# EAGLE board Tugas Akhir (EAGLE 7.5.0)
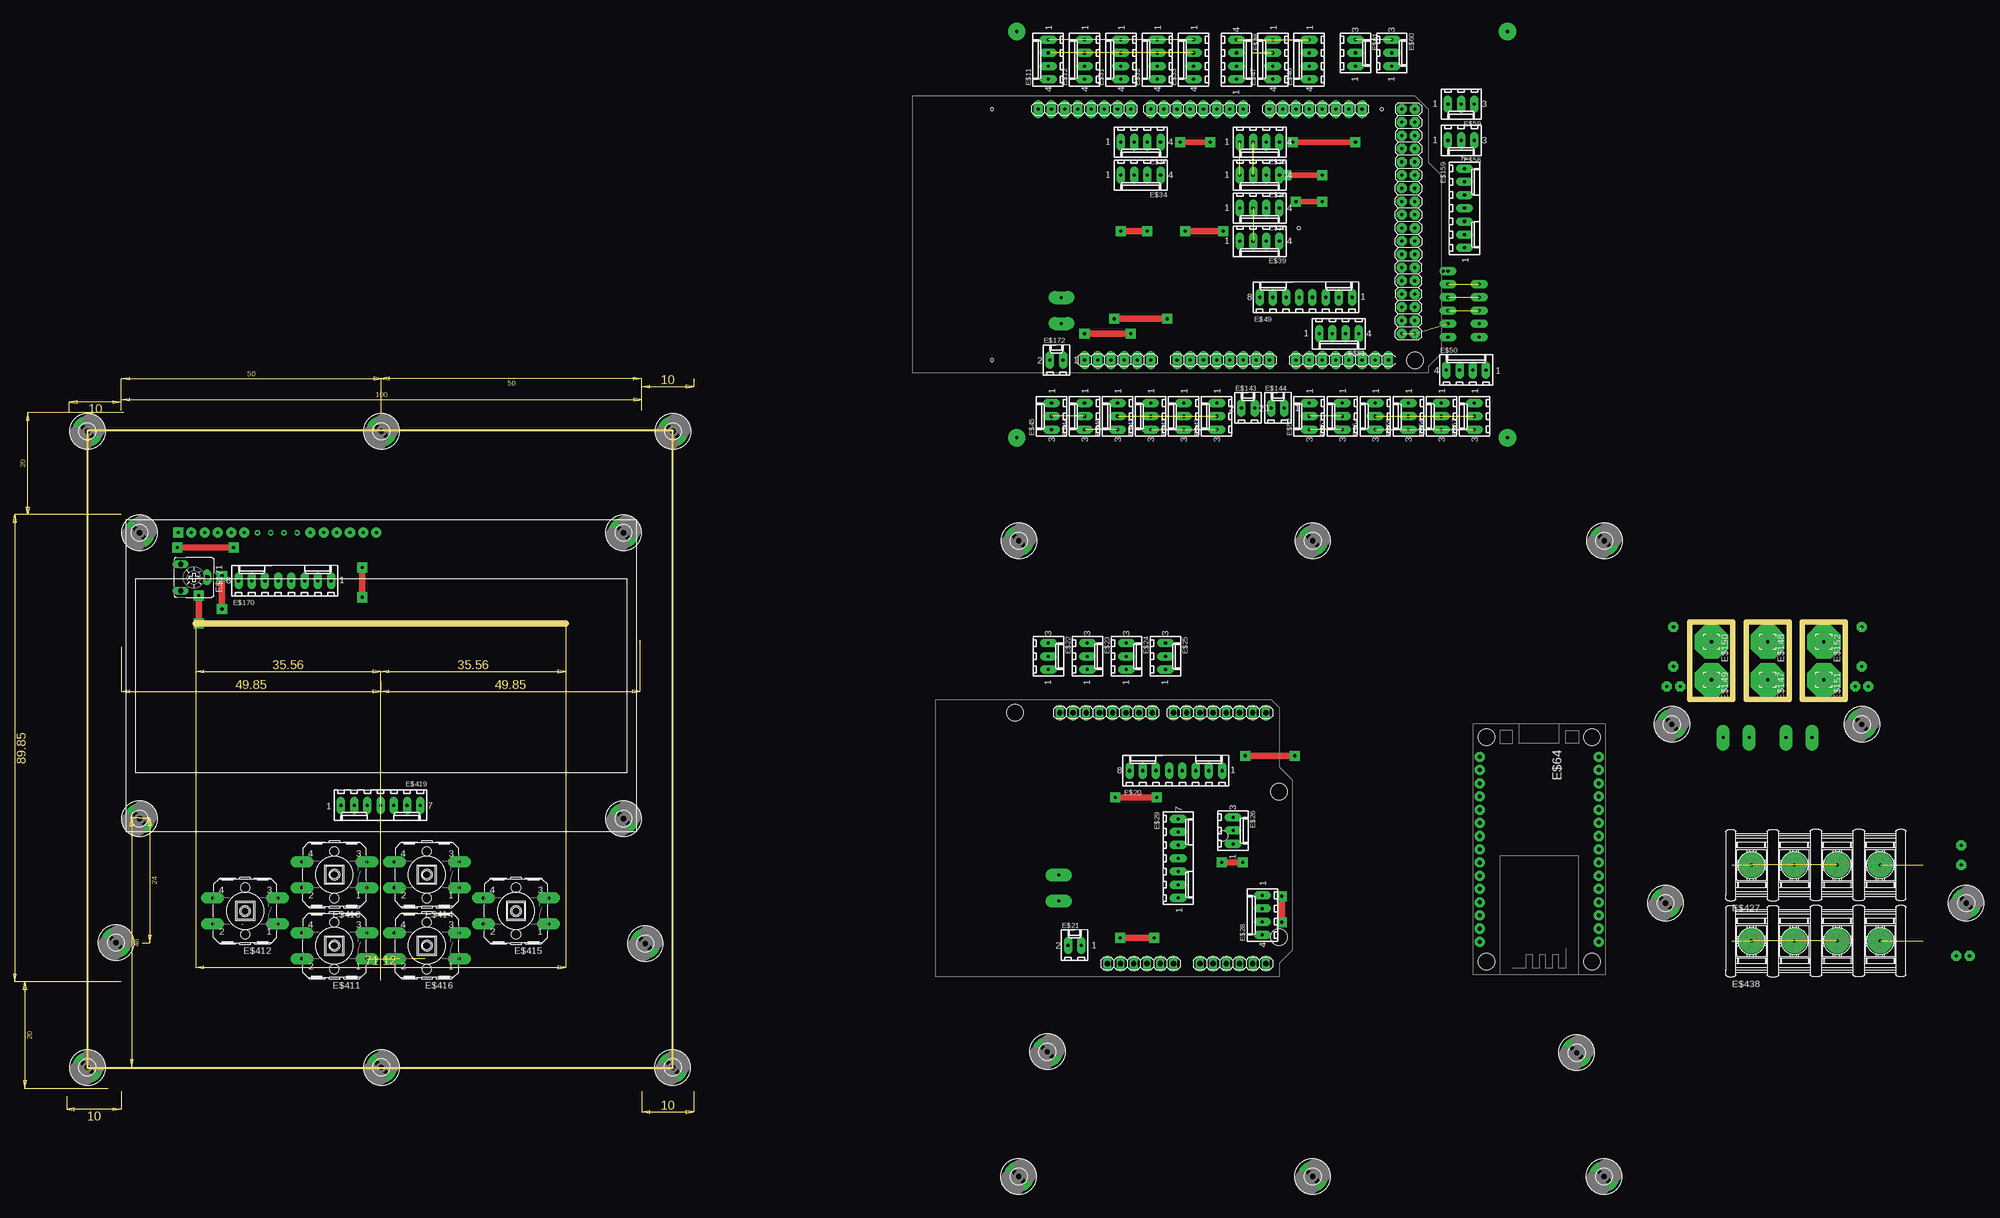
[diagram p0: board, top side]
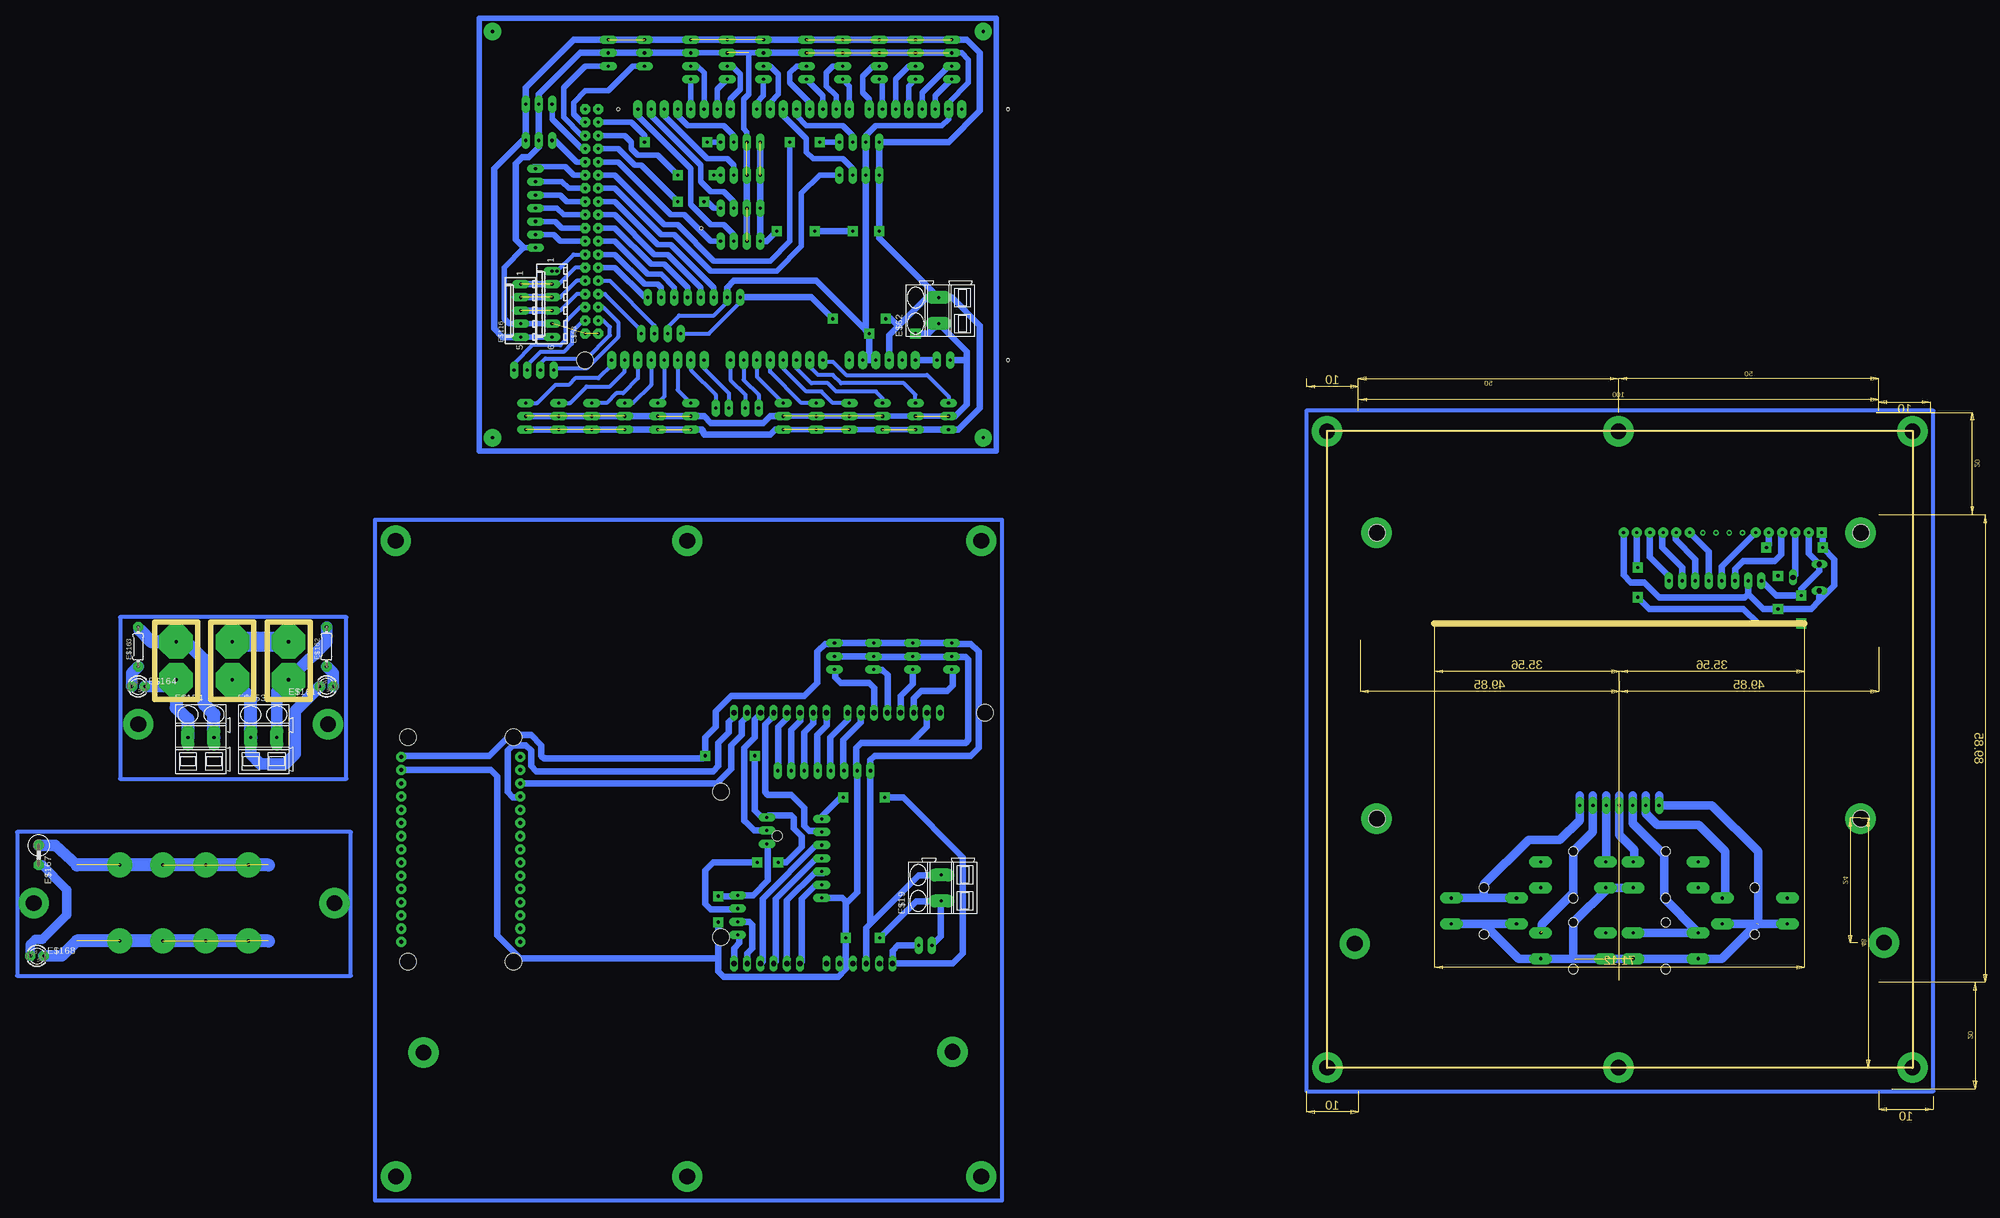
[diagram p1: board, bottom side, seen from below]

Size 352.13 x 141.6 mm. Coordinates in mm from the lower left corner, seen from the top.
Outline: 35.08,94.19 106.2,94.19
Outline: 126.8,131.3 14.3,131.3 14.3,8.8 126.8,8.8 126.8,131.3
Outline: 322.28,94.52 330.54,94.52 330.54,79.59 322.28,79.59 322.28,94.52
Outline: 333.08,94.52 341.33,94.52 341.33,79.59 333.08,79.59 333.08,94.52
Outline: 343.87,94.52 352.13,94.52 352.13,79.59 343.87,79.59 343.87,94.52
Copper layers (1*16): Top 0.035mm / dielectric 1.5mm / Bottom 0.035mm
Design rules "default": minimum track width 10mil, minimum drill 24mil, track to track 8mil, track to pad 8mil, pad to pad 8mil, via to via 8mil, smd to smd 8mil, copper to edge 40mil, drill to drill 8mil, minimum pad ring 10mil, minimum via ring 8mil, stop-mask expansion 4mil, vias tented up to drill 0mil, thermal gap 10mil

## Footprints (pad centres in the part's own frame; a part is rotated, then mirrored left to right if it is on the bottom)
3,0-PAD = drill 3 pad 5.842: B3,0 0,0
ARDUINO2009 = drill 1.016 long: 1 33.02,2.54; 2 35.56,2.54; 3 38.1,2.54; 4 40.64,2.54; 5 43.18,2.54; 6 45.72,2.54; 7 50.8,2.54; 8 53.34,2.54; 9 55.88,2.54; 10 58.42,2.54; 11 60.96,2.54; 12 63.5,2.54; 13 63.5,50.8; 14 60.96,50.8; 15 58.42,50.8; 16 55.88,50.8; 17 53.34,50.8; 18 50.8,50.8; 19 48.26,50.8; 20 45.72,50.8; 21 41.656,50.8; 22 39.116,50.8; 23 36.576,50.8; 24 34.036,50.8; 25 31.496,50.8; 26 28.956,50.8; 27 26.416,50.8; 28 23.876,50.8 | hole 3.2: 15.24,50.8; 66.04,35.56; 66.04,7.62 | hole 2: 55.17,27.114
MEGA_ARDUINO = drill 0.6 pad 1.778 long: 1 -27.94,-19.05; 2 -25.4,-19.05; 3 -22.86,-19.05; 4 -20.32,-19.05; 5 -17.78,-19.05; 6 -15.24,-19.05; 7 -10.16,-19.05; 8 -7.62,-19.05; 9 -5.08,-19.05; 10 -2.54,-19.05; 11 0,-19.05; 12 2.54,-19.05; 13 5.08,-19.05; 14 7.62,-19.05; 15 12.7,-19.05; 16 15.24,-19.05; 17 17.78,-19.05; 18 20.32,-19.05; 19 22.86,-19.05; 20 25.4,-19.05; 21 27.94,-19.05; 22 30.48,-19.05; 23 25.4,29.21; 24 22.86,29.21; 25 20.32,29.21; 26 17.78,29.21; 27 15.24,29.21; 28 12.7,29.21; 29 10.16,29.21; 30 7.62,29.21; 31 2.54,29.21; 32 0,29.21; 33 -2.54,29.21; 34 -5.08,29.21; 35 -7.62,29.21; 36 -10.16,29.21; 37 -12.7,29.21; 38 -15.24,29.21; 39 -19.05,29.21; 40 -21.59,29.21; 41 -24.13,29.21; 42 -26.67,29.21; 43 -29.21,29.21; 44 -31.75,29.21; 45 -34.29,29.21; 46 -36.83,29.21 | drill 0.6 pad 1.93 octagon: 47 33.02,29.21; 48 35.56,29.21; 49 33.02,26.67; 50 35.56,26.67; 51 33.02,24.13; 52 35.56,24.13; 53 33.02,21.59; 54 35.56,21.59; 55 33.02,19.05; 56 35.56,19.05; 57 33.02,16.51; 58 35.56,16.51; 59 33.02,13.97; 60 35.56,13.97; 61 33.02,11.43; 62 35.56,11.43; 63 33.02,8.89; 64 35.56,8.89; 65 33.02,6.35; 66 35.56,6.35; 67 33.02,3.81; 68 35.56,3.81; 69 33.02,1.27; 70 35.56,1.27; 71 33.02,-1.27; 72 35.56,-1.27; 73 33.02,-3.81; 74 35.56,-3.81; 75 33.02,-6.35; 76 35.56,-6.35; 77 33.02,-8.89; 78 35.56,-8.89; 79 33.02,-11.43; 80 35.56,-11.43; 81 33.02,-13.97; 82 35.56,-13.97 | hole 0.6: -45.72,29.21; -45.72,-19.05; 29.21,29.21; 13.208,6.35 | hole 3.2: 35.56,-19.05
6410-04 = drill 0.6 pad 1.676 long: 1 3.81,0; 2 1.27,0; 3 -1.27,0; 4 -3.81,0
SMKDSP_1,5/2 = drill 0.6 pad 2.54 long: 1 -2.5,0; 2 2.5,0
6410-08 = drill 0.6 pad 1.676 long: 1 8.89,0; 2 6.35,0; 3 3.81,0; 4 1.27,0; 5 -1.27,0; 6 -3.81,0; 7 -6.35,0; 8 -8.89,0
6410-02 = drill 0.6 pad 1.676 long: 1 1.27,0; 2 -1.27,0
6410-03 = drill 0.6 pad 1.676 long: 1 2.54,0; 2 0,0; 3 -2.54,0
6410-07 = drill 0.6 pad 1.676 long: 1 7.62,0; 2 5.08,0; 3 2.54,0; 4 0,0; 5 -2.54,0; 6 -5.08,0; 7 -7.62,0
6410-06 = drill 0.6 pad 1.676 long: 1 6.35,0; 2 3.81,0; 3 1.27,0; 4 -1.27,0; 5 -3.81,0; 6 -6.35,0
ESP12E_DEVKIT = drill 0.8 pad 1.93: 3V3@0 -11.43,-7.62; 3V3@1 11.43,5.08; 3V3@2 11.43,-17.78; AD0 -11.43,17.78; CLK -11.43,-2.54; CMD -11.43,2.54; D0 11.43,17.78; D1 11.43,15.24; D2 11.43,12.7; D3 11.43,10.16; D4 11.43,7.62; D5 11.43,0; D6 11.43,-2.54; D7 11.43,-5.08; D8 11.43,-7.62; EN -11.43,-10.16; GND@0 -11.43,-5.08; GND@1 -11.43,-15.24; GND@2 11.43,2.54; GND@3 11.43,-15.24; RST -11.43,-12.7; RSV@0 -11.43,15.24; RSV@1 -11.43,12.7; RX 11.43,-10.16; SD0 -11.43,0; SD1 -11.43,5.08; SD2 -11.43,7.62; SD3 -11.43,10.16; TX 11.43,-12.7; VIN -11.43,-17.78 | hole 3.2: -10.16,21.59; 10.16,21.59; 10.16,-21.59; -10.16,-21.59
6410-05 = drill 0.6 pad 1.676 long: 1 5.08,0; 2 2.54,0; 3 0,0; 4 -2.54,0; 5 -5.08,0
3,17/1,3 = drill 0.6 pad 6.452 octagon: 1 0,0
LED3MM = drill 0.6 pad 1.93 octagon: A -1.27,0; K 1.27,0
0204/7 = drill 0.6 pad 1.93 octagon: 1 -3.81,0; 2 3.81,0
0411V = drill 0.6 pad 1.93 octagon: 1 -2.54,0; 2 1.27,0
LCD-20X4-4HOLES = drill 0.6 pad 1.93 square: P$1 10,57.5 | drill 0.6 pad 1.93: P$2 12.54,57.5; P$3 15.08,57.5; P$4 17.62,57.5; P$5 20.16,57.5; P$6 22.7,57.5; P$11 35.4,57.5; P$12 37.94,57.5; P$13 40.48,57.5; P$14 43.02,57.5; P$15 45.56,57.5; P$16 48.1,57.5 | drill 0.5 pad 0.254: P$7 25.24,57.5; P$8 27.78,57.5; P$9 30.32,57.5; P$10 32.86,57.5 | hole 3.2: 2.5,2.5; 2.5,57.5; 95.5,57.5; 95.5,2.5
CA6V = drill 1.016 long: A -2.54,-2.54; E 2.54,-2.54; S 0,2.54
B3F-40XX = drill 0.6 pad 2.184 long: 1 -6.248,2.489; 2 6.248,2.489; 3 -6.248,-2.489; 4 6.248,-2.489 | hole 1.803: 0,-4.496; 0,4.496
5202-04-N-02 = drill 0.6 pad 4.826: 1 -12.375,0; 2 -4.125,0; 3 4.125,0; 4 12.375,0

## Placement (x,y rotation side)
E$1  [3,0-PAD]  14.28,8.88 0 top
E$2  [3,0-PAD]  126.78,8.88 0 top
E$3  [3,0-PAD]  14.29,131.15 0 top
E$4  [3,0-PAD]  126.81,131.15 0 top
E$5  [3,0-PAD]  70.79,131.15 0 top
E$6  [3,0-PAD]  70.78,8.88 0 top
E$7  [3,0-PAD]  198.78,11.88 0 top
E$8  [3,0-PAD]  300.5,11.7 0 top
E$9  [ARDUINO2009]  177.3,26.3 0 top
E$10  [MEGA_ARDUINO]  233.86,163.91 0 top  (outside the outline)
E$11  [6410-04]  198.94,202.65 90 top  (outside the outline)
E$12  [6410-04]  205.92,202.65 90 top  (outside the outline)
E$13  [3,0-PAD]  193.28,-12.12 0 top  (outside the outline)
E$14  [3,0-PAD]  305.78,-12.12 0 top  (outside the outline)
E$15  [3,0-PAD]  193.29,110.15 0 top
E$16  [3,0-PAD]  305.81,110.15 0 top
E$17  [3,0-PAD]  249.79,110.15 0 top
E$18  [3,0-PAD]  249.78,-12.12 0 top  (outside the outline)
E$19  [SMKDSP_1,5/2]  200.98,43.38 90 bottom
E$20  [6410-08]  223.47,65.92 0 top
E$21  [6410-02]  204.02,32.36 0 top
E$22  [6410-03]  198.98,87.91 270 top
E$23  [6410-03]  206.48,87.91 270 top
E$24  [6410-03]  213.98,87.91 270 top
E$25  [6410-03]  221.48,87.91 270 top
E$26  [6410-03]  234.48,54.41 270 top
E$28  [6410-04]  240.1,38.14 90 top
E$29  [6410-07]  223.95,49.07 270 top
E$31  [6410-04]  212.91,202.65 90 top  (outside the outline)
E$32  [6410-04]  219.89,202.65 90 top  (outside the outline)
E$33  [6410-04]  226.88,202.65 90 top  (outside the outline)
E$34  [6410-04]  216.72,180.42 180 top  (outside the outline)
E$35  [6410-04]  239.58,186.77 180 top  (outside the outline)
E$36  [6410-04]  239.58,180.42 180 top  (outside the outline)
E$37  [6410-04]  216.72,186.77 180 top  (outside the outline)
E$38  [6410-04]  239.58,174.07 180 top  (outside the outline)
E$39  [6410-04]  239.58,167.72 180 top  (outside the outline)
E$40  [6410-03]  212.27,134.06 90 top
E$41  [6410-03]  218.62,134.06 90 top
E$42  [6410-03]  224.97,134.06 90 top
E$43  [6410-03]  231.32,134.06 90 top
E$44  [6410-03]  205.92,134.06 90 top
E$45  [6410-03]  199.57,134.06 90 top
E$46  [6410-04]  249.1,202.65 90 top  (outside the outline)
E$47  [6410-04]  242.12,202.65 90 top  (outside the outline)
E$48  [6410-04]  235.13,202.65 270 top  (outside the outline)
E$49  [6410-08]  248.47,156.93 0 top  (outside the outline)
E$50  [6410-04]  279.26,142.96 0 top
E$51  [6410-04]  254.82,149.94 180 top  (outside the outline)
E$52  [6410-03]  249.1,134.06 90 top
E$53  [6410-03]  255.45,134.06 90 top
E$54  [6410-03]  261.8,134.06 90 top
E$55  [6410-03]  268.15,134.06 90 top
E$56  [6410-03]  274.5,134.06 90 top
E$57  [6410-03]  280.85,134.06 90 top
E$58  [6410-03]  278.31,187.09 180 top  (outside the outline)
E$59  [6410-03]  278.31,194.07 180 top  (outside the outline)
E$60  [6410-03]  264.98,203.92 270 top  (outside the outline)
E$61  [6410-03]  257.99,203.92 270 top  (outside the outline)
E$62  [SMKDSP_1,5/2]  201.48,154.39 90 bottom  (outside the outline)
E$63  [6410-06]  275.77,155.66 90 bottom  (outside the outline)
E$64  [ESP12E_DEVKIT]  293.3,50.8 180 top
E$116  [6410-05]  281.81,154.39 90 bottom  (outside the outline)
E$143  [6410-02]  237.36,135.65 0 top
E$144  [6410-02]  243.07,135.65 0 top
E$147  [3,17/1,3]  337.2,83.41 270 top
E$148  [3,17/1,3]  337.2,90.71 270 top
E$149  [3,17/1,3]  326.41,83.41 270 top
E$150  [3,17/1,3]  326.41,90.71 270 top
E$151  [3,17/1,3]  348,83.41 270 top
E$152  [3,17/1,3]  348,90.71 270 top
E$153  [SMKDSP_1,5/2]  331.17,72.29 0 bottom
E$154  [SMKDSP_1,5/2]  343.24,72.29 0 bottom
E$159  [6410-07]  278.95,174.07 270 top  (outside the outline)
E$161  [LED3MM]  319.11,82.13 180 bottom
E$162  [0204/7]  319.11,89.75 90 bottom
E$163  [0204/7]  355.3,89.75 90 bottom  (outside the outline)
E$164  [LED3MM]  355.3,82.13 0 bottom
E$167  [0411V]  374.42,49.05 270 bottom  (outside the outline)
E$168  [LED3MM]  374.74,30.32 0 bottom  (outside the outline)
E$169  [LCD-20X4-4HOLES]  21.75,54.18 0 top
E$170  [6410-08]  52.23,102.44 0 top
E$171  [CA6V]  34.77,103.08 270 top
E$172  [6410-02]  200.52,144.86 0 top  (outside the outline)
E$184  [3,0-PAD]  317.59,40.47 0 top
E$185  [3,0-PAD]  375.38,40.47 0 top  (outside the outline)
E$186  [3,0-PAD]  318.79,74.83 0 top
E$187  [3,0-PAD]  355.3,74.83 0 top  (outside the outline)
E$411  [B3F-40XX]  61.75,32.28 180 top
E$412  [B3F-40XX]  44.61,38.95 180 top
E$413  [B3F-40XX]  61.75,45.93 180 top
E$414  [B3F-40XX]  79.53,45.93 180 top
E$415  [B3F-40XX]  96.68,38.95 180 top
E$416  [B3F-40XX]  79.53,32.28 180 top
E$417  [3,0-PAD]  19.78,32.88 0 top
E$418  [3,0-PAD]  121.5,32.7 0 top
E$419  [6410-07]  70.64,59.27 180 top
E$420  [3,0-PAD]  24.29,56.72 0 top
E$421  [3,0-PAD]  117.31,56.72 0 top
E$422  [3,0-PAD]  24.29,111.65 0 top
E$423  [3,0-PAD]  117.31,111.65 0 top
E$427  [5202-04-N-02]  346.48,47.78 0 top
E$438  [5202-04-N-02]  346.48,33.17 0 top

## Library data of the parts
E$1-E$8 E$13-E$18 E$184-E$187 E$417 E$418 E$420-E$423 = holes
E$9 E$10 = arduino
E$11 E$12 E$20-E$26 E$28 E$29 E$31-E$61 E$63 E$116 E$143 E$144 E$159 E$170 E$172 E$419 = con-molex
E$19 E$62 E$153 E$154 = con-phoenix-smkdsp
E$64 = ESP12E_DEVKIT
E$147-E$152 = wirepad
E$161 E$164 E$168 = led
E$162 E$163 E$167 = resistor
E$169 = HD44780LCD
E$171 = pot
E$411-E$416 = switch-omron
E$427 E$438 = con-ebyelectro

## Nets
S$3: E$10.34 E$37.3
S$4: E$10.33 E$34.3
S$5: E$10.52 E$60.1
S$6: E$10.50 E$61.1
S$7: E$10.73 E$51.3
S$8: E$10.54 E$59.1
S$9: E$10.56 E$58.1
S$10: E$10.44 E$11.4
S$11: E$10.43 E$11.3
S$12: E$10.26 E$35.3
S$13: E$10.25 E$36.3
S$14: E$10.24 E$38.3
S$15: E$10.23 E$39.3
S$16: E$10.42 E$12.4
S$17: E$10.41 E$12.3
S$18: E$10.40 E$31.4
S$19: E$10.39 E$31.3
S$20: E$10.58 E$159.7
S$21: E$10.38 E$32.4
S$22: E$10.37 E$32.3
S$23: E$10.36 E$33.4
S$24: E$10.35 E$33.3
S$25: E$10.31 E$48.1
S$27: E$10.32 E$48.2
S$28: E$10.49 E$35.4
S$29: E$10.51 E$36.4
S$30: E$10.53 E$38.4
S$31: E$10.55 E$39.4
S$32: E$10.57 E$37.4
S$33: E$10.59 E$34.4
S$34: E$10.61 E$49.6
S$35: E$10.75 E$51.4
S$36: E$10.76
S$37: E$10.72
S$38: E$10.74
S$39: E$10.70 E$63.1
S$40: E$10.63 E$49.5
S$41: E$10.13 E$143.2
S$42: E$10.11 E$42.1
S$43: E$10.10 E$41.1
S$44: E$10.9 E$40.1
S$45: E$10.8 E$44.1
S$46: E$10.7 E$45.1
S$47: E$10.14 E$143.1
S$48: E$10.65 E$49.4
S$49: E$10.67 E$49.3
S$50: E$10.12 E$43.1
S$51: E$10.15 E$144.2
S$52: E$10.16 E$144.1
S$53: E$10.71 E$49.1
S$54: E$10.69 E$49.2
S$55: E$10.17 E$52.1
S$57: E$10.60 E$159.6
S$58: E$10.30 E$47.3
S$59: E$10.29 E$47.4
S$60: E$10.28 E$46.3
S$61: E$10.27 E$46.4
S$62: E$10.18 E$53.1
S$63: E$10.19 E$54.1
S$64: E$10.20 E$55.1
S$65: E$10.21 E$56.1
S$66: E$10.22 E$57.1
S$67: E$10.68 E$159.2
S$68: E$10.79 E$50.3
S$69: E$10.77 E$50.4
S$70: E$10.80 E$50.2
S$71: E$10.78 E$50.1
S$72: E$10.66 E$159.3
S$73: E$10.64 E$159.4
S$74: E$10.62 E$159.5
S$75: E$9.16 E$29.6
S$76: E$9.4 E$9.5 E$9.27 E$19.1 E$20.7 E$21.2 E$22.2 E$23.2 E$24.2 E$25.2 E$26.1 E$28.1 E$29.1 E$64.GND@1
S$77: E$9.1 E$21.1 E$29.7
S$79: E$9.13 E$64.RX
S$80: E$9.26 E$22.1
S$81: E$9.25 E$23.1
S$82: E$9.24 E$24.1
S$83: E$9.23 E$25.1
S$84: E$10.3 E$11.1 E$12.1 E$31.1 E$32.1 E$33.1 E$34.1 E$35.1 E$36.1 E$37.1 E$38.1 E$39.1 E$40.3 E$41.3 E$42.3 E$43.3 E$44.3 E$45.3 E$46.1 E$47.1 E$48.4 E$49.8 E$51.1 E$52.3 E$53.3 E$54.3 E$55.3 E$56.3 E$57.3 E$58.3 E$59.3 E$60.3 E$61.3 E$62.2 E$63.6 E$116.5
S$85: E$10.4 E$10.5 E$10.45 E$10.81 E$10.82 E$11.2 E$12.2 E$31.2 E$32.2 E$33.2 E$34.2 E$35.2 E$36.2 E$37.2 E$38.2 E$39.2 E$40.2 E$41.2 E$42.2 E$43.2 E$44.2 E$45.2 E$46.2 E$47.2 E$48.3 E$49.7 E$51.2 E$52.2 E$53.2 E$54.2 E$55.2 E$56.2 E$57.2 E$58.2 E$59.2 E$60.2 E$61.2 E$62.1 E$63.5 E$116.4 E$159.1 E$172.2
S$86: E$63.4 E$116.3
S$87: E$63.3 E$116.2
S$88: E$63.2 E$116.1
S$90: E$9.14 E$64.TX
S$95: E$9.17 E$20.1
S$96: E$9.18 E$20.2
S$97: E$9.19 E$20.3
S$98: E$9.20 E$20.4
S$99: E$9.12 E$28.4
S$100: E$9.11 E$28.3
S$101: E$9.7 E$29.2
S$102: E$9.8 E$29.3
S$103: E$9.9 E$29.4
S$104: E$9.10 E$29.5
S$105: E$9.21 E$20.5
S$106: E$9.22 E$20.6
S$107: E$9.15 E$26.2
S$110: E$9.3 E$19.2 E$20.8 E$22.3 E$23.3 E$24.3 E$25.3 E$26.3 E$28.2 E$64.VIN
S$114: E$149.1 E$153.2 E$162.2
S$115: E$148.1 E$150.1
S$199: E$147.1 E$153.1 E$161.K
S$200: E$152.1 E$154.2 E$163.2
S$201: E$151.1 E$154.1 E$164.K
S$204: E$161.A E$162.1
S$205: E$163.1 E$164.A
S$212: E$167.2 E$168.A
S$213: E$169.P$2 E$169.P$15 E$170.8 E$171.A
S$214: E$169.P$1 E$169.P$5 E$169.P$16 E$170.7 E$171.E
S$215: E$169.P$4 E$170.6
S$216: E$169.P$6 E$170.5
S$217: E$169.P$14 E$170.1
S$218: E$169.P$13 E$170.2
S$219: E$169.P$12 E$170.3
S$220: E$169.P$11 E$170.4
S$221: E$169.P$3 E$171.S
S$225: E$10.1 E$172.1
S$401: E$411.3 E$411.4 E$419.3
S$402: E$411.1 E$411.2 E$412.1 E$412.2 E$413.1 E$414.2 E$415.1 E$415.2 E$416.1 E$416.2 E$419.1
S$403: E$412.3 E$419.2
S$404: E$413.3 E$419.4
S$405: E$414.4 E$419.5
S$406: E$416.3 E$419.6
S$407: E$415.3 E$415.4 E$419.7
S$424: E$167.1 E$427.1 E$427.2 E$427.3 E$427.4
S$425: E$168.K E$438.1 E$438.2 E$438.3 E$438.4

## Tracks (layer width: path | path; a pad name or v marks a point on that pad's centre or on a via)
S$1
  Bottom 0.813: 189.3,114.14 309.81,114.14 309.81,-16.71 189.3,-16.71 189.3,114.14
S$2  (via drill 0.6 pad 1.93)
  other vias: 212.8,33.8
S$3
  Bottom 1.016: E$10.34 228.78,191.85 226.88,189.95 219.89,189.95 217.99,188.04 E$37.3
S$4
  Bottom 1.016: E$10.33 231.32,191.85 226.88,187.41 226.88,184.87 225.61,183.59 219.89,183.59 217.99,181.69 E$34.3
S$5
  Bottom 1.016: E$10.52 270.06,188.04 273.55,191.53 273.55,197.25 269.42,201.38 E$60.1
S$6
  Bottom 1.016: E$61.1 260.21,201.38 264.98,196.61 269.42,196.61 271.64,194.39 271.64,192.17 270.06,190.58 E$10.50
S$7
  Bottom 0.813: E$10.73 264.66,160.1 256.09,151.53 E$51.3
S$8
  Bottom 1.016: E$10.54 270.06,185.5 275.77,191.22 E$59.1
S$9
  Bottom 1.016: E$10.56 271.01,182.96 275.14,187.09 E$58.1
S$10
  Bottom 1.016: E$10.44 202.11,195.66 E$11.4
S$11
  Bottom 1.016: E$10.43 204.65,196.3 199.57,201.38 E$11.3
S$12
  Bottom 1.016: E$10.26 251.64,191.85 249.74,189.95 242.75,189.95 240.85,188.04 E$35.3
S$13
  Bottom 1.016: E$10.25 254.18,191.85 245.93,183.59 242.12,183.59 240.85,182.33 E$36.3
S$14
  Bottom 1.016: E$10.24 256.72,191.85 247.2,182.33 247.2,179.15 245.29,177.25 242.75,177.25 240.85,175.34 E$38.3
S$15
  Bottom 1.016: E$10.23 259.26,191.85 249.1,181.69 249.1,174.71 245.29,170.9 242.75,170.9 240.85,168.99 E$39.3
S$16
  Bottom 1.016: E$10.42 207.19,197.56 E$12.4
S$17
  Bottom 1.016: E$10.41 209.73,198.84 207.19,201.38 E$12.3
S$18
  Bottom 1.016: E$10.40 212.27,198.2 E$31.4
S$19
  Bottom 1.016: E$10.39 214.81,195.03 216.08,196.3 216.08,199.47 214.18,201.38 E$31.3
S$20
  Bottom 1.016: E$159.7 279.26,182.01 273.23,182.01 271.64,180.42 E$10.58
S$21
  Bottom 1.016: E$10.38 218.62,197.56 E$32.4
S$22
  Bottom 1.016: E$32.3 221.8,201.38 223.07,200.11 223.07,197.56 221.16,195.66 E$10.37
S$23
  Bottom 1.016: E$10.36 223.7,195.66 E$33.4
S$24
  Bottom 1.016: E$10.35 226.24,194.39 230.05,198.2 230.05,200.11 228.78,201.38 E$33.3
S$25
  Bottom 1.016: E$48.1 235.13,195.66 236.4,194.39 E$10.31
S$26
  Bottom 1.016: 190.37,210.58 289.74,210.58 289.74,127.4 190.37,127.4 190.37,210.58
S$27
  Bottom 1.016: E$48.2 233.86,201.38 232.27,199.79 232.27,195.98 233.86,194.39 E$10.32
S$28  (via drill 0.6 pad 1.93)
  Top 1.016: v245.93,186.77 v257.99,186.77
  Bottom 1.016: E$35.4 v245.93,186.77 | E$10.49 260.53,190.58 257.99,188.04 v257.99,186.77
S$29  (via drill 0.6 pad 1.93)
  Top 1.016: v244.66,180.42 v251.64,180.42
  Bottom 1.016: E$36.4 v244.66,180.42 | E$10.51 261.8,188.04 260.53,186.77 260.53,185.5 259.26,184.23 255.45,184.23 v251.64,180.42
S$30  (via drill 0.6 pad 1.93)
  Top 1.016: v251.64,175.34 v246.56,175.34
  Bottom 1.016: E$10.53 263.07,185.5 259.9,182.33 258.63,182.33 v251.64,175.34 | v246.56,175.34 245.93,175.34 244.66,174.07 E$38.4
S$31
  Bottom 1.016: E$10.55 263.07,182.96 252.91,172.8 250.37,172.8 245.29,167.72 E$39.4
S$32  (via drill 0.6 pad 1.93)
  Top 1.016: v224.34,186.77 v230.05,186.77
  Bottom 1.016: E$37.4 v224.34,186.77 | v230.05,186.77 230.05,167.72 233.86,163.91 244.66,163.91 251.64,170.9 254.18,170.9 263.71,180.42 E$10.57
S$33
  Bottom 1.016: E$10.59 263.71,177.88 254.82,168.99 252.28,168.99 245.29,162.01 232.59,162.01 227.83,166.77 227.83,176.93 224.34,180.42 E$34.4
S$34
  Bottom 1.016: E$10.61 263.71,175.34 255.45,167.09 252.91,167.09 244.66,158.83 E$49.6
S$35
  Bottom 0.813: E$10.75 265.61,157.56 258.63,150.58 E$51.4
S$36
  Bottom 0.813: E$10.76 271.01,157.56 274.19,154.39 275.77,154.39
  Bottom 1.27: 275.77,154.39 282.44,154.39
S$37
  Bottom 0.813: E$10.72 271.33,162.64 274.5,159.47 275.77,159.47
  Bottom 1.27: 275.77,159.47 282.44,159.47
S$38
  Bottom 0.813: E$10.74 271.01,160.1 274.19,156.93 275.77,156.93
  Bottom 1.27: 282.44,156.93 275.77,156.93
S$39  (via drill 0.6)
  Top 0.813: E$63.1 v274.82,162.01
  Bottom 0.813: v274.82,162.01 271.64,165.18 E$10.70
S$40
  Bottom 1.016: E$10.63 263.71,172.8 256.09,165.18 253.55,165.18 247.2,158.83 E$49.5
S$41
  Bottom 0.813: E$10.13 238.94,141.05 236.08,138.19 E$143.2
S$42
  Bottom 0.813: E$42.1 227.83,136.61 233.86,142.64 E$10.11
S$43
  Bottom 0.813: E$41.1 221.8,136.61 224.02,138.83 226.88,138.83 231.32,143.27 E$10.10
S$44
  Bottom 0.813: E$40.1 212.27,137.56 213.54,138.83 221.16,138.83 222.75,140.42 225.93,140.42 228.78,143.27 E$10.9
S$45
  Bottom 0.813: E$10.8 226.24,143.59 224.65,142 221.8,142 220.21,140.42 208.14,140.42 205.92,138.19 E$44.1
S$46
  Bottom 0.813: E$10.7 223.38,144.54 221.8,144.54 219.26,142 203.7,142 199.57,137.88 E$45.1
S$47
  Bottom 0.813: E$10.14 241.48,141.05 238.62,138.19 E$143.1
S$48
  Bottom 1.016: E$10.65 263.71,170.26 256.72,163.28 254.18,163.28 249.74,158.83 E$49.4
S$49
  Bottom 1.016: E$10.67 263.71,167.72 257.36,161.37 254.82,161.37 252.28,158.83 E$49.3
S$50
  Bottom 0.813: E$10.12 236.4,141.69 E$43.1
S$51
  Bottom 0.813: E$10.15 246.56,143.27 241.8,138.51 E$144.2
S$52
  Bottom 0.813: E$10.16 249.1,142.96 244.34,138.19 E$144.1
S$53
  Bottom 1.016: E$10.71 263.71,162.64 257.99,156.93 E$49.1
S$54
  Bottom 1.016: E$10.69 263.71,165.18 257.99,159.47 255.45,159.47 254.82,158.83 E$49.2
S$55
  Bottom 0.813: E$10.17 251.64,139.15 E$52.1
S$56  (via drill 0.6 pad 1.93)
  other vias: 219.3,33.8
S$57
  Bottom 1.016: E$10.60 272.6,177.88 273.87,179.15 E$159.6
S$58
  Bottom 1.016: E$10.30 241.48,195.03 239.58,196.93 239.58,199.79 241.17,201.38 E$47.3
S$59
  Bottom 1.016: E$10.29 244.02,196.93 E$47.4
S$60
  Bottom 1.016: E$10.28 246.56,200.11 247.83,201.38 E$46.3
S$61
  Bottom 1.016: E$10.27 E$46.4
S$62
  Bottom 0.813: E$10.18 254.18,137.88 E$53.1
S$63
  Bottom 0.813: E$10.19 256.72,140.1 260.21,136.61 E$54.1
S$64
  Bottom 0.813: E$10.20 259.26,141.37 262.12,138.51 263.39,138.51 265.3,136.61 E$55.1
S$65
  Bottom 0.813: E$56.1 272.28,136.61 269.11,139.78 264.66,139.78 261.8,142.64 E$10.21
S$66
  Bottom 0.813: E$57.1 278.63,136.61 275.14,140.1 272.6,140.1 271.33,141.37 266.88,141.37 264.34,143.91 E$10.22
S$67
  Bottom 1.016: E$159.2 275.45,168.99 274.19,167.72 E$10.68
S$68
  Bottom 0.813: E$50.3 278,144.23 277.04,145.18 269.11,145.18 264.66,149.62 264.66,151.21 265.93,152.48 E$10.79
S$69
  Bottom 0.813: E$10.77 265.93,155.02 263.07,152.16 263.07,149.31 269.11,143.27 275.14,143.27 E$50.4
S$70
  Bottom 0.813: E$10.80 269.74,152.48 271.96,150.26 271.96,148.04 273.55,146.45 278,146.45 280.54,143.91 E$50.2
S$71
  Bottom 0.813: E$10.78 270.38,155.02 273.23,152.16 273.23,148.67 274.19,147.72 279.58,147.72 283.07,144.23 E$50.1
S$72
  Bottom 1.016: E$159.3 275.14,171.53 273.87,170.26 E$10.66
S$73
  Bottom 1.016: E$10.64 273.55,172.8 274.82,174.07 E$159.4
S$74
  Bottom 1.016: E$159.5 274.19,176.61 272.92,175.34 E$10.62
S$75
  Bottom 1.27: E$9.16 233.18,76.42 234.8,74.8 234.8,61.8 234.3,61.3 229.8,61.3 227.3,58.8 227.3,55.3 226.3,54.3 224.1,54.3 E$29.6
S$76  (via drill 0.6 pad 1.93)
  Top 1.27: v219.3,33.8 v212.8,33.8 | v243.8,41.8 v243.8,36.8
  Bottom 1.27: E$9.5 E$9.4 219.26,28.84 219.3,28.8 | 219.3,28.8 v219.3,33.8 219.3,40.3 | v212.8,33.8 205.8,40.8 201.06,40.8 | 201.06,40.8 E$19.1 | E$29.1 219.95,41.45 219.3,40.8 219.3,40.3 | 203.8,74.3 203.72,74.38 E$9.27 203.72,76.88 203.8,76.8 203.8,74.3 | 206.8,71.3 216.3,71.3 217.3,70.3 217.3,66.11 E$20.7 217.12,42.48 219.3,40.3 | 203.8,74.3 206.8,71.3 | 206.8,71.3 196.3,71.3 195.8,71.8 195.8,87.3 196.3,87.8 198.8,87.8 | 198.8,87.8 198.86,87.8 | 198.86,87.8 E$22.2 198.92,87.91 198.8,87.8 | 198.86,87.8 206.36,87.8 E$23.2 206.69,87.91 206.8,87.8 213.86,87.8 E$24.2 E$25.2 | 201.06,40.8 201.06,34.05 E$21.2 | E$26.1 234.3,51.7 234.3,44.8 237.14,41.95 E$28.1 239.95,41.95 239.8,41.8 v243.8,41.8 | v243.8,36.8 243.8,29.8 | 243.8,29.8 243.8,27.3 242.8,26.3 220.8,26.3 219.3,27.8 219.3,28.8 | E$64.GND@1 287.54,66.04 286.3,64.8 286.3,34.3 282.05,30.05 281.8,29.8 243.8,29.8
S$77  (via drill 0.6 pad 1.93)
  Top 1.27: v211.8,60.8 v219.8,60.8
  Bottom 1.27: E$21.1 205.36,32.3 209.3,32.3 210.32,31.28 E$9.1 198.76,28.84 196.8,30.8 196.8,49.3 208.3,60.8 v211.8,60.8 | v219.8,60.8 220.3,60.8 223.95,57.15 E$29.7
S$78  (via drill 0.6 pad 1.93)
  other vias: 236.8,68.8
S$79
  Bottom 1.27: E$9.13 240.8,76.3 241.8,75.3 241.8,73.3 243.8,71.3 243.8,66.8 244.8,65.8 278.8,65.8 279.8,66.8 279.8,69.8 280.8,70.8 283.3,70.8 284.3,69.8 284.3,61.8 283.3,60.8 282.03,60.8 E$64.RX
S$80
  Bottom 1.27: E$9.26 206.26,76.84 206.3,76.8 206.3,79.8 204.8,81.3 199.8,81.3 198.8,82.3 198.8,85.2 E$22.1
S$81
  Bottom 1.27: E$23.1 206.48,82.62 208.8,80.3 E$9.25
S$82
  Bottom 1.27: E$24.1 213.88,85.38 213.8,85.3 212.3,85.3 211.3,84.3 211.3,77.14 E$9.24
S$83
  Bottom 1.27: E$9.23 213.88,81.88 214.8,82.8 220.3,82.8 221.3,83.8 221.3,85.2 E$25.1
S$84  (via drill 0.6 pad 1.93)  (15 unrouted)
  Top 1.27: v221.8,152.8 v211.64,152.8 | v232.59,169.62 v225.29,169.62 | v217.99,169.62 v212.91,169.62
  Bottom 0.813: E$51.1 245.61,149.94 239.58,155.97 E$49.8
  Bottom 1.016: E$63.6 E$116.5 | E$45.3 E$44.3 E$43.3
  Bottom 1.27: E$37.1 E$34.1 | E$35.1 E$38.1 E$39.1 234.5,167.72 v232.59,169.62 | E$57.3 E$52.3 246.88,131.53 246.56,130.57 233.86,130.57 232.91,131.53 E$43.3 | E$44.3 197.67,131.53 193.54,135.65 193.54,151.53 198.9,156.89 E$62.2 | E$10.3 211,149.62 209.26,151.37 | 209.26,151.37 203.7,156.93 201.52,156.93 E$62.2 | E$37.1 v212.91,169.62 212.91,168.31 E$62.2 | E$49.8 225.93,156.93 v221.8,152.8 | v211.64,152.8 210.69,152.8 209.26,151.37 | v225.29,169.62 v217.99,169.62 | E$37.1 199.57,186.77 193.54,192.8 193.54,203.92 196.08,206.46 E$11.1 E$46.1 E$60.3 271.64,206.46 280.85,197.25 E$59.3 | E$58.3 E$59.3 | E$59.3 280.85,187.72 286.88,181.69 286.88,150.89 285.3,149.31 E$116.5
S$85  (via drill 0.6 pad 1.93)  (17 unrouted)
  Top 1.27: v214.81,149.94 v205.92,149.94
  Bottom 0.813: E$51.2 253.55,151.21 251.32,153.43 244.66,153.43 242.12,155.97 E$49.7
  Bottom 1.016: E$63.5 E$116.4 284.03,151.84 284.98,152.8 284.98,162.64 281.17,166.45 E$159.1 | 199.57,203.92 197.03,203.92 195.76,202.65 195.76,198.2 199.57,194.39 E$10.45 199.57,191.22 200.84,189.95 213.54,189.95 215.45,188.04 E$37.2 | E$43.2 E$45.2 | E$35.2 238.31,188.68 238.94,189.31 238.94,195.03 237.99,195.98 237.99,203.92 | E$48.3 237.99,203.92 | 237.99,203.92 E$46.2
  Bottom 1.27: E$48.3 199.57,203.92 E$11.2 | E$37.2 E$34.2 215.45,150.58 v214.81,149.94 | E$39.2 E$35.2 | 214.81,144.86 E$10.5 | E$45.2 198.3,134.06 196.08,136.29 196.08,144.54 | 196.08,144.54 196.08,146.49 E$62.1 203.42,149.94 v205.92,149.94 | E$57.2 E$52.2 246.56,134.06 245.29,132.8 235.13,132.8 233.86,134.06 E$43.2 | E$10.4 214.81,144.86 | 214.81,144.86 v214.81,149.94 | E$49.7 242.12,158.83 240.85,160.1 224.97,160.1 v214.81,149.94 | E$46.2 E$61.2 E$60.2 270.38,203.92 278.31,195.98 E$59.2 E$58.2 278.31,185.82 280.22,183.91 281.49,183.91 282.76,182.64 282.76,168.04 281.17,166.45 | E$172.2 196.4,144.86 196.08,144.54
S$86  (1 unrouted)
S$87  (1 unrouted)
S$88  (1 unrouted)
S$89  (via drill 0.6 pad 3.3)
  other vias: 287.2,208.04
S$90
  Bottom 1.27: E$9.14 238.26,76.34 239.3,75.3 239.3,72.8 241.3,70.8 241.3,66.3 243.55,64.05 243.8,63.8 244.1,63.5 E$64.TX
S$91  (via drill 0.6 pad 3.3)
  other vias: 192.9,208.04
S$92  (via drill 0.6 pad 3.3)
  other vias: 192.9,129.94
S$93  (via drill 0.6 pad 1.93)
  other vias: 219.8,60.8
S$94  (via drill 0.6 pad 1.93)
  other vias: 211.8,60.8
S$95
  Bottom 1.27: E$9.17 230.64,75.96 232.3,74.3 232.3,65.98 E$20.1
S$96
  Bottom 1.27: E$9.18 228.1,75.5 229.8,73.8 229.8,65.94 E$20.2
S$97
  Bottom 1.27: E$9.19 225.56,75.04 227.3,73.3 227.3,65.95 E$20.3
S$98
  Bottom 1.27: E$9.20 223.02,74.58 224.8,72.8 224.8,65.99 E$20.4
S$99
  Bottom 1.27: 240.8,28.8 E$9.12 240.8,31.8 239.8,32.8 239.8,34.03 E$28.4
S$100
  Bottom 1.27: E$9.11 238.26,30.84 237.3,31.8 237.3,36.3 237.88,36.88 E$28.3
S$101
  Bottom 1.27: E$29.2 225.11,43.99 227.8,41.3 227.8,29.14 E$9.7
S$102
  Bottom 1.27: E$29.3 223.68,46.3 225.3,46.3 230.55,41.05 230.64,40.96 E$9.8
S$103
  Bottom 1.27: E$29.4 225.03,49.07 232.8,41.3 232.8,29.22 E$9.9
S$104
  Bottom 1.27: E$29.5 224.99,51.61 235.3,41.3 235.3,29.26 E$9.10
S$105
  Bottom 1.27: E$9.21 218.96,75.64 222.3,72.3 222.3,66.03 E$20.5
S$106
  Bottom 1.27: E$9.22 216.42,75.18 219.8,71.8 219.8,66.07 E$20.6
S$107
  Bottom 1.27: E$26.2 236.92,54.41 238.55,56.05 238.8,56.3 238.8,70.3 236.8,72.3 236.8,75.8 235.8,76.8 235.8,77.02 E$9.15
S$108  (via drill 0.6 pad 1.93)
  other vias: 246.3,68.8
S$109  (via drill 0.6 pad 1.93)
  other vias: 243.8,41.8
S$110  (via drill 0.6 pad 1.93)
  Top 1.27: v236.8,68.8 v246.3,68.8 | v236.3,48.3 v232.3,48.3
  Bottom 1.27: E$9.3 215.4,35.7 214.58,36.52 | 214.58,36.52 205.3,45.8 201.06,45.8 E$19.2 | 214.58,36.52 E$20.8 214.58,68.02 213.8,68.8 195.3,68.8 193.8,70.3 193.8,88.8 195.3,90.3 198.82,90.3 E$22.3 E$23.3 E$24.3 E$25.3 221.63,90.3 223.3,90.3 224.8,88.8 224.8,82.8 227.3,80.3 241.3,80.3 244.3,77.3 244.3,74.3 246.3,72.3 v246.3,68.8 246.8,68.3 277.3,68.3 277.8,68.8 277.8,70.8 279.8,72.8 283.8,72.8 287.8,68.8 304.8,68.8 304.73,68.73 E$64.VIN | v236.8,68.8 236.8,58.3 235.45,56.95 E$26.3 234.13,57.3 229.8,57.3 229.3,56.8 229.3,54.8 227.8,53.3 227.8,51.3 230.8,48.3 v232.3,48.3 | E$28.2 240.19,39.41 240.3,39.3 245.3,39.3 246.3,40.3 246.3,46.8 244.8,48.3 v236.3,48.3
S$111  (via drill 0.6 pad 1.93)
  other vias: 243.8,36.8
S$112  (via drill 0.6 pad 1.93)
  other vias: 236.3,48.3
S$113  (via drill 0.6 pad 1.93)
  other vias: 232.3,48.3
S$114
  Bottom 2.184: E$162.2 319.11,90.71 325.3,84.52 E$149.1 328.67,81.14 E$153.2
S$115
  Bottom 3.81: E$150.1 E$148.1
S$199
  Bottom 2.184: E$161.K 325.14,77.37 325.14,69.12 327.05,67.21 331.81,67.21 333.71,69.12 333.71,72.25 E$153.1
  Bottom 2.54: E$153.1 333.67,79.87 E$147.1
S$200  (1 unrouted)
  Bottom 2.54: E$154.2 340.74,76.78 342.6,78.64 342.6,87.22 346.1,90.71 E$152.1 352.76,90.71 354.99,92.93
S$201
  Bottom 2.184: E$164.K 349.27,82.13 E$151.1
  Bottom 2.54: E$151.1 348,78.01 345.78,75.78 345.78,72.33 E$154.1
S$203
  Bottom 0.813: 314.42,54.13 378.55,54.13 378.55,26.5 314.42,26.5 314.42,54.13
S$204
  Bottom 2.184: E$161.A 317.84,84.67 E$162.1
S$205
  Bottom 2.184: E$164.A 356.57,84.67 E$163.1
S$206
  Bottom 0.813: 315.3,95.47 358.8,95.47 358.8,64.36 315.3,64.36 315.3,95.47
S$212
  Bottom 1.778: E$167.2 373.79,47.78 369.03,43.02 369.03,38.25 373.79,33.49 375.06,33.49 376.01,32.54 E$168.A
S$213  (via drill 0.6 pad 1.93)
  Top 1.27: v67.15,104.98 v67.15,99.27 | v35.72,94.19 v35.72,99.59
  Bottom 1.27: E$170.8 40.48,99.59 v35.72,99.59 35.72,100.86 32.22,104.35 E$171.A 34.29,107.68 E$169.P$2 | E$169.P$15 67.31,105.46 v67.15,104.98 | v67.15,99.27 64.93,97.05 46.83,97.05 43.97,94.19 v35.72,94.19
S$214  (via drill 0.6 pad 1.93)
  Top 1.27: v42.38,108.8 v31.59,108.8 | v40.16,103.4 v40.16,97.05
  Bottom 1.27: E$169.P$5 41.91,109.27 v42.38,108.8 | E$169.P$1 31.59,111.53 v31.59,108.8 29.37,106.57 29.37,101.49 32.22,98.63 | E$170.7 45.88,99.91 | 45.88,99.91 43.02,97.05 v40.16,97.05 33.81,97.05 32.22,98.63 | E$169.P$16 69.85,103.55 68.42,102.13 65.88,102.13 63.02,99.27 46.51,99.27 45.88,99.91 | E$171.E 32.22,98.63
S$215
  Bottom 1.27: E$170.6 48.42,104.67 46.83,106.25 40.8,106.25 39.53,107.52 39.53,111.52 E$169.P$4
S$216
  Bottom 1.27: E$170.5 50.96,105.17 E$169.P$6
S$217
  Bottom 1.27: E$169.P$14 64.77,107.05 61.12,103.4 E$170.1
S$218
  Bottom 1.27: E$170.2 58.58,104.98 62.39,108.8 62.39,111.52 E$169.P$13
S$219
  Bottom 1.27: E$170.3 56.04,106.57 59.85,110.38 59.85,111.52 E$169.P$12
S$220
  Bottom 1.27: E$170.4 53.5,108.03 E$169.P$11
S$221
  Bottom 1.27: E$169.P$3 36.83,103.56 E$171.S
S$222
  Bottom 0.813: 10.29,135.15 130.81,135.15 130.81,4.29 10.29,4.29 10.29,135.15
S$225
  Bottom 1.27: E$10.1 E$172.1
S$238  (via drill 0.6 pad 3.3)
  other vias: 287.2,129.94
S$401
  Bottom 1.676: E$411.3 E$411.4 62.07,41.33 62.07,49.74 68.1,55.77 E$419.3 68.1,61.17
S$402  (3 unrouted)
  Bottom 1.676: 79.22,29.79 E$411.2 50.96,29.79 44.29,36.46 | 79.22,29.79 E$416.1 90.01,29.79 96.68,36.46 | E$414.2 E$413.1 72.81,43.44 79.53,36.72 79.53,30.11 79.22,29.79 | E$419.1 52.86,59.27 43.97,50.38 43.97,36.4 | E$412.2 44.29,36.46 | 44.29,36.46 E$412.1 | E$415.2 96.68,36.46 | 96.68,36.46 E$415.1
S$403
  Bottom 1.676: 65.56,61.17 E$419.2 65.56,57.68 63.34,55.45 55.4,55.45 50.32,50.38 50.32,41.97 E$412.3
S$404
  Bottom 1.676: E$413.3 67.78,48.63 67.78,50.69 70.64,53.55 E$419.4 70.64,61.17
S$405
  Bottom 1.676: E$414.4 73.18,48.52 E$419.5 73.18,61.17
S$406  (1 unrouted)
  Bottom 1.676: 85.56,34.98 85.56,36.4 79.53,42.44 79.53,50.38 75.72,54.18 E$419.6 75.72,61.17
S$407
  Bottom 1.676: 78.26,61.17 E$419.7 78.26,56.41 82.07,52.6 88.1,52.6 96.68,44.02 96.68,41.43 | E$415.3 96.68,41.43 | 96.68,41.43 E$415.4
S$408
  Bottom 1.676: 63.02,59.58 63.02,61.17
S$424  (4 unrouted)
  Bottom 2.184: E$167.1 371.24,51.59 367.11,47.78
  Bottom 2.54: 330.3,47.78 367.11,47.78
S$425  (4 unrouted)
  Bottom 2.184: E$168.K 369.97,30.32 367.11,33.17
  Bottom 2.54: 330.3,33.17 367.11,33.17